# Altium PCB Powerboard.PcbDoc (part 2 of 2)
Units mm, origin at the board's own origin, x right, y up, seen from the top; angles counter-clockwise.
Board outline 74 x 33 mm, 4 copper layers (Top Layer, Layer 1, Layer 2, Bottom Layer), stack 1.17 mm thick; 86 components, 35 nets, 205 pads, 352 vias.
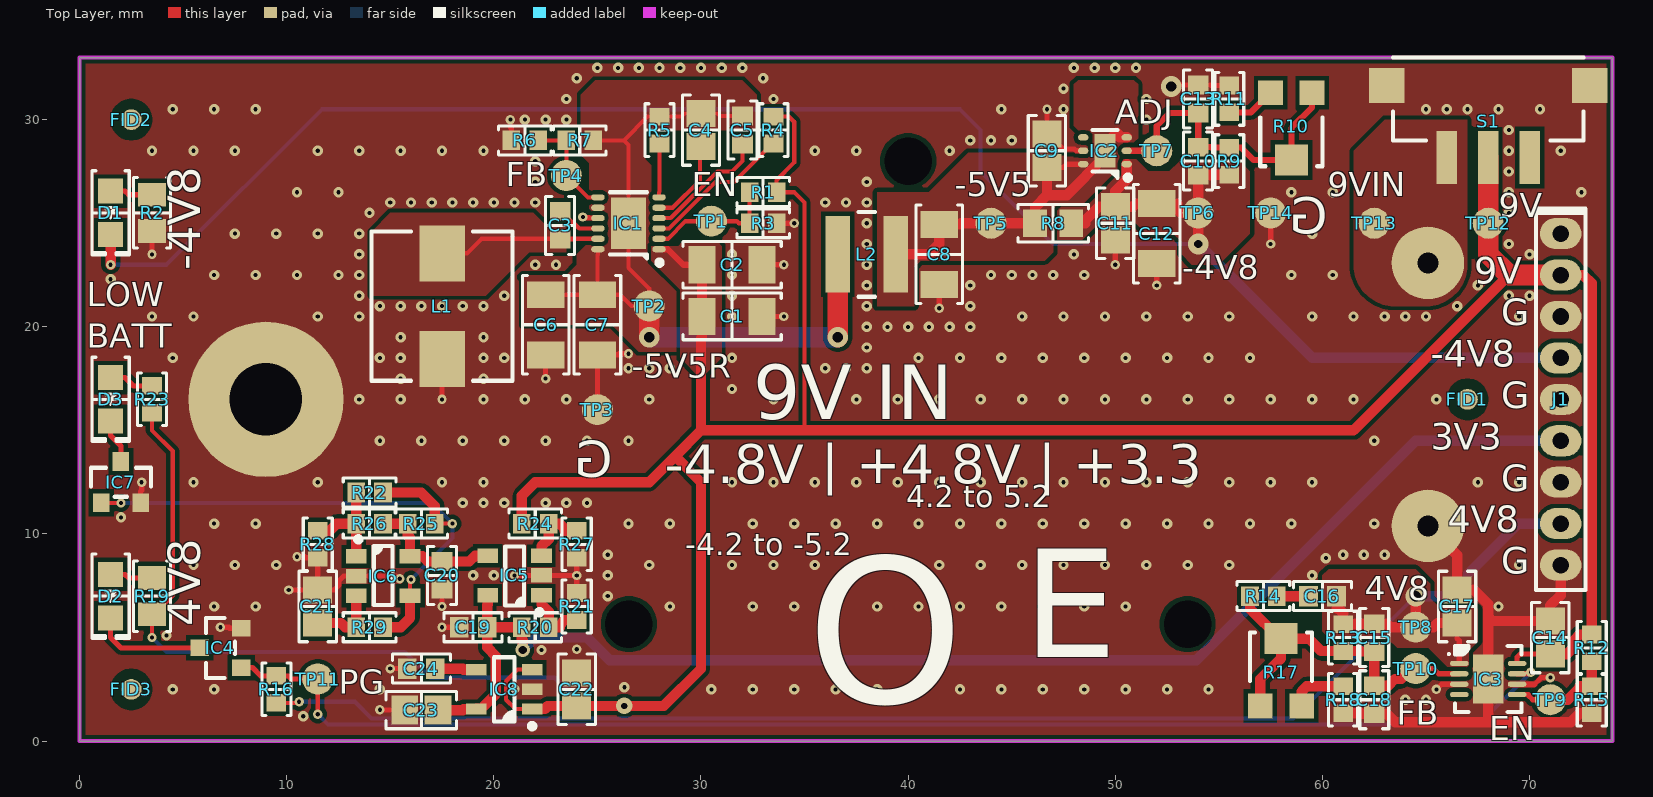
[diagram p0: Top Layer view]

## Part data (continued)
R22 R26 R28: library part RMCF0603FG150K, "RES 150K OHM 1% 1/10W 0603", Device Package="0603 (1608 Metric)", Manufacturer="Stackpole Electronics Inc", Operating Temperature="-55°C ~ 155°C", Power (Watts)="0.1W, 1/10W", Ratings=AEC-Q200, Supplier Device Package=0603, Supplier Part Number 1=RMCF0603FG150KCT-ND, Temperature Coefficient=±100ppm/°C, Tolerance=±1%, ComponentLink1Description=Datasheet, ComponentLink1URL=https://www.seielect.com/catalog/sei-rmcf_rmcp.pdf, ComponentLink2Description="DigiKey Link", ComponentLink2URL=https://www.digikey.com/en/products/detail/stackpole-electronics-inc/RMCF0603FG150K/1713634, Composition="Thick Film", Features="Automotive AEC-Q200", Height - Seated (Max)="0.022\" (0.55mm)", LastUpdated="20/06/2022 12:10:18", Lifecycle Status=Active, Minimum Order=1, Number of Terminations=2, Package / Case="0603 (1608 Metric)", Packaging=CutTape, Part Number=RMCF0603FG150K, Part Status=Active, PartId=13982, Price=0.01, Resistance="150 kOhms", Series=RMCF, Size / Dimension="0.061\" L x 0.031\" W (1.55mm x 0.80mm)", Supplier 1=DigiKey
R23: library part RK73H1JTTD9310F, "RES 931 OHM 1% 1/8W 0603", Device Package="0603 (1608 Metric)", Manufacturer="KOA Speer Electronics, Inc.", Operating Temperature="-55°C ~ 155°C", Power (Watts)="0.125W, 1/8W", Ratings=AEC-Q200, Supplier Device Package=0603, Supplier Part Number 1=2019-RK73H1JTTD9310FTR-ND, Temperature Coefficient=±100ppm/°C, Tolerance=±1%, ComponentLink1Description=Datasheet, ComponentLink1URL=http://www.koaspeer.com/catimages/Products/RK73H/RK73H.pdf, ComponentLink2Description="DigiKey Link", ComponentLink2URL=https://www.digikey.com/en/products/detail/koa-speer-electronics-inc/RK73H1JTTD9310F/9845315, Composition="Thick Film", Features="Automotive AEC-Q200, Moisture Resistant", Height - Seated (Max)="0.022\" (0.55mm)", LastUpdated="20/06/2022 12:10:31", Lifecycle Status=Active, Minimum Order=0, Number of Terminations=2, Package / Case="0603 (1608 Metric)", Part Number=RK73H1JTTD9310F, Part Status=Active, PartId=8605, Price=0, Resistance="931 Ohms", Series=RK73H, Size / Dimension="0.063\" L x 0.031\" W (1.60mm x 0.80mm)", Supplier 1=DigiKey
R24: library part RC0603FR-07300KL, "RES 300K OHM 1% 1/10W 0603", Device Package="0603 (1608 Metric)", Manufacturer=Yageo, Operating Temperature="-55°C ~ 155°C", Power (Watts)="0.1W, 1/10W", Supplier Device Package=0603, Supplier Part Number 1=311-300KHRCT-ND, Temperature Coefficient=±100ppm/°C, Tolerance=±1%, ComponentLink1Description=Datasheet, ComponentLink1URL=https://www.yageo.com/upload/media/product/productsearch/datasheet/rchip/PYu-RC_Group_51_RoHS_L_10.pdf, ComponentLink2Description="DigiKey Link", ComponentLink2URL=https://www.digikey.com/en/products/detail/yageo/RC0603FR-07300KL/727145, Composition="Thick Film", Features="Moisture Resistant", Height - Seated (Max)="0.022\" (0.55mm)", LastUpdated="20/06/2022 12:10:33", Lifecycle Status=Active, Minimum Order=1, Number of Terminations=2, Package / Case="0603 (1608 Metric)", Packaging=CutTape, Part Number=RC0603FR-07300KL, Part Status=Active, PartId=7517, Price=0.01, Resistance="300 kOhms", Series=RC_L, Size / Dimension="0.063\" L x 0.031\" W (1.60mm x 0.80mm)", Supplier 1=DigiKey
R25: library part RMCF0603FT1K00, "RES 1K OHM 1% 1/10W 0603", Device Package="0603 (1608 Metric)", Manufacturer="Stackpole Electronics Inc", Operating Temperature="-55°C ~ 155°C", Power (Watts)="0.1W, 1/10W", Ratings=AEC-Q200, Supplier Device Package=0603, Supplier Part Number 1=RMCF0603FT1K00CT-ND, Temperature Coefficient=±100ppm/°C, Tolerance=±1%, ComponentLink1Description=Datasheet, ComponentLink1URL=https://www.seielect.com/catalog/sei-rmcf_rmcp.pdf, ComponentLink2Description="DigiKey Link", ComponentLink2URL=https://www.digikey.com/en/products/detail/stackpole-electronics-inc/RMCF0603FT1K00/1761077, Composition="Thick Film", Features="Automotive AEC-Q200", Height - Seated (Max)="0.022\" (0.55mm)", LastUpdated="20/06/2022 12:09:49", Lifecycle Status=Active, Minimum Order=1, Number of Terminations=2, Package / Case="0603 (1608 Metric)", Packaging=CutTape, Part Number=RMCF0603FT1K00, Part Status=Active, PartId=23839, Price=0.01, Resistance="1 kOhms", Series=RMCF, Size / Dimension="0.061\" L x 0.031\" W (1.55mm x 0.80mm)", Supplier 1=DigiKey
S1: "SWITCH SLIDE SPDT 0.4VA 28V", Current Rating (Amps)="0.4VA (AC/DC)", Manufacturer="NKK Switches", Operating Temperature="-25°C ~ 85°C", Supplier Part Number 1=360-2924-1-ND, Voltage Rating - AC=28V, Actuator Length=2.00mm, Actuator Type=Standard, Circuit=SPDT, ComponentLink1Description=Datasheet, ComponentLink1URL=http://www.nkkswitches.com/pdf/SS3surfaceMount-1.pdf, ComponentLink2Description="DigiKey Link", ComponentLink2URL=http://digikey.com/product-detail/en/nkk-switches/SS312SAH4-R/360-2924-1-ND/1051215, Contact Finish=Gold, Contact Material="Phosphor Bronze", Contact Timing="Shorting (MBB)", LastUpdated="04/01/2020 19:10:14", Lifecycle Status=Active, Minimum Order=1, Mounting Type="Surface Mount, Right Angle", Packaging=TapeAndReel, Part Number=SS312SAH4-R, Part Status=Active, PartId=1, Price=1.95, Series=SS3, Supplier 1=DigiKey, Switch Function=On-On, Termination Style="Gull Wing", Voltage Rating - DC=28V
TP1 TP2 TP3 TP4 TP5 TP6 TP7 TP8 TP9 TP10 TP11 TP12 TP13 TP14: library part CMP-003-000000-1, Component Type="Standard (No BOM)", Design Item ID="Test Point", Pin Count=1, Source="Test Point.SchLib"

## Free pads (board coordinates)
  round 7.5 hole 3.5: M(9,16.5)

## Via types
v1: diameter 0.5, hole 0.2, Top Layer to Bottom Layer, tented both sides, 308 vias
v2: diameter 0.45, hole 0.2, Top Layer to Bottom Layer, tented both sides, 37 vias
v3: diameter 1, hole 0.5, Top Layer to Bottom Layer, tented both sides, 4 vias
v4: diameter 1, hole 0.4, Top Layer to Bottom Layer, tented both sides, 1 vias
v5: diameter 0.7, hole 0.4, Top Layer to Bottom Layer, tented both sides, 1 vias
v6: diameter 0.8, hole 0.3, Top Layer to Bottom Layer, tented both sides, 1 vias

## Nets (pads, with @x,y where several pads share a name; then routed paths per layer and width w, separated by ;. In a path a pad name is that pad's centre, name@x,y a point inside that pad or via, vN(x,y) a via of type N, cw(c..) or ccw(c..) an arc to the next point about the centre after c; other vN are vias at no path point)
3V3: C19.2 C23.2 IC5.5 IC8.5 J1.6 R20.2 | length 66.1
  Top Layer w0.5: C23.2 18.5,1.5 18.55,1.55 IC8.5 19.175,1.575 19.4,1.575 20.1,2.275 20.1,4.1 19.675,4.525 C19.2 ; IC5.5 19.7,6.6 19.675,6.575 C19.2 ; v5(21.4,4.4) 21.4,4.875 21.35,4.925 R20.2 C19.2
  Bottom Layer w0.5: v5(21.4,4.4) 22,5 24.5,5 25.6,3.9 53.9,3.9 64.5,14.5 J1.6
3V3BYPASS: C24.2 IC8.4 | length 2
  Top Layer w0.5: C24.2 18.5,3.5 18.55,3.45 IC8.4
4V8: C15.2 C16.2 C17.2 IC3.1 J1.8 R13.2 R16.2 TP8.1 | length 77
  Top Layer w0.2: R16.2@9.55,1.9 R16.2 10.6,1.85 v2(10.6,1.9)
  Top Layer w0.25: C17.2 66.5,4.95 66.605,4.845 IC3.1
  Top Layer w0.5: C16.2 60.675,6.4 60.775,6.4 61,6.175 R13.2 61.575,5.65 61.6,5.675 C15.2 63.1,5.675 63.275,5.5 TP8.1 ; v3(64.5,7) TP8.1 ; C17.2 65.55,5.7 65.35,5.5 TP8.1
  Bottom Layer w0.2: v2(10.6,1.9) 13.298,1.9 14.098,1.1 58.6,1.1 v3(64.5,7)
  Bottom Layer w0.5: v3(64.5,7) 65.962,7 69.462,10.5 J1.8
9V: C1.2 C2.2 C14.2 C22.2 IC1.1 IC3.8 IC8.1 IC8.3 J1.2 R1.2 R4.1 R12.2 R19.2 R23.2 R24.2 S1.2 TP12.1 | length 172.5
  Top Layer w0.2: v2(3.5,5) R19.2 3.6,6.125 4.5,7.025 4.5,14 3.5,15 R23.2 ; IC8.1 21.039,1.55 20.589,2 20.589,2.893 21.146,3.45 IC8.3 ; R4.1 34.25,30.15 34.5,29.9 34.5,27.925 33.65,27.075 R1.2 34.5,26.5 35,26 35,15
  Top Layer w0.25: IC3.8 69.395,4.052 69.543,4.2 C14.2
  Top Layer w0.3: IC1.1 28.4,23.75 29.15,23 C2.2
  Top Layer w0.5: R24.2 21.35,11.85 22,12.5 27.5,12.5 28.75,13.75 ; IC8.1 22.45,1.55 22.6,1.7 C22.2 28.2,1.7 30,3.5 30,12.5 28.75,13.75 ; C2.2 C1.2 30.05,19.5 30,19.45 30,15 ; 69,22.5 61.5,15 35,15 30,15 ; C14.2 71.8,4.2 72.15,4.55 72.15,4.875 72.425,5.15 R12.2 73,22.1 72.6,22.5 J1.2 ; 28.75,13.75 30,15
  Top Layer w1: S1.2 TP12.1 68,23.5 69,22.5 J1.2
  Bottom Layer w0.2: v2(3.5,5) 4.2,4.3 15.7,4.3 16.94,3.06 22.94,3.06 24.3,1.7 v6(26.3,1.7)
9VIN: B1.1 S1.1 TP13.1
-4V8: C10.2 C11.2 C12.2 D1.2 IC2.1 J1.4 R8.2 R9.2 TP6.1 | length 94.8
  Top Layer w0.5: v2(1.5,23) 1.5,23.75 D1.2 ; R8.2 48.55,25 48.55,25.15 49.2,25.8 C11.2 ; IC2.1 50.55,27.1 50,26.55 C11.2 ; v4(54,24) 54,24.65 TP6.1 ; R9.2 54.625,27.35 54.6,27.325 C10.2 TP6.1 ; C11.2 50.85,25.8 51,25.95 C12.2 53,25.95 53,25.65 53.15,25.5 TP6.1
  Bottom Layer w0.2: v2(1.5,23) 4.2,23 11.7,30.5 42.5,30.5 43.5,29.5 43.5,27.5 47,24 v4(54,24)
  Bottom Layer w0.5: v4(54,24) 59.5,18.5 J1.4
-5V5: C8.2 C9.2 IC2.3 IC2.6 IC2.7 L2.2 R8.1 TP5.1 | length 18.3
  Top Layer w0.25: C9.2 47.5,27.7 47.65,27.85 IC2.6
  Top Layer w0.5: L2.2 41,23.5 41.5,24 C8.2 42.5,24.95 42.55,25 TP5.1 R8.1 46.125,25.775 46.7,26.35 ; C9.2 46.7,26.35 ; IC2.3 50.2,29.15 50.2,29.241 50.071,29.371 49.5,28.8 IC2.7 49.5,28.2 47.65,26.35 46.7,26.35
-5V5REG: C4.1 C5.1 C6.1 C7.1 IC1.8 IC1.12 IC1.13 L2.1 R5.1 R7.1 TP2.1 | length 38.3
  Top Layer w0.2: C6.1 C7.1 ; R7.1 26.275,29 ; IC1.12 25.025,23.5 25,23.475 C7.1 ; C5.1 30.925,30.175 30.8,30.3 C4.1 29.2,30.3 29.05,30.15 R5.1 27.425,30.15 26.275,29 ; C7.1 26.1,21.55 26.65,21 TP2.1 27.5,21.85 26.5,22.85 IC1.13 26.5,28.775 26.275,29
  Top Layer w1: v3(27.5,19.5) 27.5,20.15 TP2.1 ; v3(36.6,19.5) L2.1
  Bottom Layer w1: v3(27.5,19.5) v3(36.6,19.5)
ADJ_-4V8: C10.1 C13.2 IC2.2 R9.1 R10.1 R10.2 TP7.1 | length 15
  Top Layer w0.3: IC2.2 TP7.1 52,29.7 52.625,30.325 C13.2 C10.1 54.6,28.675 54.625,28.65 R9.1 56.075,28.65 56.675,28.05 R10.2 58.5,29.6 59.5,30.6 R10.1
BLINK_FB: IC6.1 R22.2 R26.1 R28.2 | length 5.1
  Top Layer w0.5: R28.2 12.075,10.15 12.425,10.5 R26.1 ; R22.2 13.35,11.075 R26.1 ; IC6.1 13.356,9.919 13.35,9.925 R26.1
BLINK_GATE: IC6.4 IC7.1 R22.1 R25.1 R29.2 | length 28.7
  Top Layer w0.2: IC7.1 v2(2,11.5) ; IC6.4 15.956,7.756 v2(16,7.8) ; R25.1 v2(18,10.5)
  Top Layer w0.5: R29.2 15.5,5.5 15.956,5.956 IC6.4 ; R22.1 15.175,12 16.5,12 17.15,11.35 R25.1
  Bottom Layer w0.2: v2(2,11.5) 17,11.5 v2(18,10.5) 18,9.8 v2(16,7.8)
BLINK_INV: C21.2 IC6.3 R29.1 | length 3.5
  Top Layer w0.5: C21.2 12.625,5.7 12.825,5.5 R29.1 13.35,6.075 13.356,6.081 IC6.3
BLINK_LED: D3.2 IC7.3 | length 2.2
  Top Layer w0.25: D3.2 1.5,14.75 2,14.25 IC7.3
BST_-5V5: C3.2 IC1.10 | length 2.2
  Top Layer w0.2: C3.2 23.25,25.575 23.771,25.054 23.821,25.054 24.125,24.75 IC1.10
EN_4V8: IC3.5 R12.1 R15.2 TP9.1 | length 5.2
  Top Layer w0.25: IC3.5 69.945,2.25 69.945,2.205 70.15,2 TP9.1
  Top Layer w0.5: TP9.1 71.85,2 72.425,2.575 72.425,2.65 R15.2 73,3.325 R12.1
EN_-5V5: IC1.2 R1.1 R3.2 TP1.1 | length 6.3
  Top Layer w0.2: IC1.2 28.4,24.25 29.25,25.1 TP1.1 31.725,25.1 31.825,25 R3.2 32.35,25.575 R1.1
FB_4V8: C15.1 C18.2 IC3.2 R13.1 R14.1 R17.1 R17.2 TP10.1 | length 17.3
  Top Layer w0.25: TP10.1 65.35,3.5 65.6,3.25 IC3.2
  Top Layer w0.5: R14.1 56.5,6.425 56.5,6.4 57.95,4.95 R17.2 ; R17.1 57,3 58,4 R17.2 ; TP10.1 64.298,3.5 63.798,3 63.5,3 63.175,2.675 C18.2 C15.1 61.9,4.325 61.875,4.35 59.95,4.35 59.35,4.95 R17.2
FB_-5V5: IC1.7 R6.1 R7.2 TP4.1 | length 5
  Top Layer w0.2: R6.1 R7.2 TP4.1 24.55,26.25 IC1.7
GND: B1.2 C1.1 C2.1 C6.2 C7.2 C8.1 C9.1 C11.1 C12.1 C13.1 C14.1 C17.1 C18.1 C19.1 C20.1 C21.1 C22.1 C23.1 C24.1 IC1.9 IC2.5 IC3.3 IC3.6 IC3.9 IC4.2 IC5.2 IC6.2 IC7.2 IC8.2 J1.1 J1.3 J1.5 J1.7 J1.9 L1.2 pad.M R2.2 R3.1 R6.2 R11.1 R15.1 R18.1 R21.1 R27.1 R28.1 S1.M TP3.1 TP14.1 | length 75
  Top Layer w0.25: IC7.2 2.95,12.05 3,12.1 v2(3,12.5) ; v2(3.5,23.5) R2.2 ; v2(6.8,5.5) 7.2,5.5 7.25,5.45 IC4.2 ; v2(10.1,7.3) C21.1 ; v2(10.5,8.9) 10.875,8.9 10.925,8.85 R28.1 C21.1 ; v2(14.5,1.515) 14.515,1.5 C23.1 ; v2(15,3.5) C24.1 ; v2(15.461,7.839) 15.407,7.839 15.279,7.967 12.756,7.967 12.528,7.739 12.528,7.528 12.3,7.3 C21.1 ; v2(17.5,5.5) C19.1 ; v2(17.5,6.5) C20.1 ; v2(17.5,16.5) 17.5,17 L1.2 ; v2(20.8,30) 20.8,29.625 20.85,29.575 R6.2 ; v2(21,8) IC5.2 v2(24,8) ; v2(22.5,17.5) C6.2@22.5,18.05 ; R21.1 24,7.675 v2(24,8) ; R27.1 24,8.325 v2(24,8) ; v2(24.3,25.3) 24.338,25.262 24.588,25.262 24.6,25.25 IC1.9 ; TP3.1 25,18.125 C7.2@25.525,18.65 ; C7.2 C7.2@25.525,18.65 ; v2(26.5,18.7) 26.05,18.7 26,18.65 C7.2@25.525,18.65 ; C1.1 33.7,20.5 v2(34,20.5) ; C2.1 33.7,23 v2(34,23) ; R3.1 v2(34.5,25) ; v2(41.5,20.9) C8.1 ; v2(46.7,30.5) C9.1 46.75,29.3 47.471,28.579 48.021,28.579 48.1,28.5 IC2.5 ; v2(50,23) C11.1 ; v2(52,22) C12.1 ; v3(52.7,31.6) 52.775,31.675 C13.1 54.6,31.675 54.625,31.65 R11.1 ; v2(57.5,24) TP14.1 ; v2(65.5,2.5) 65.75,2.75 IC3.3 ; IC3.6 70.25,2.75 70.565,3.065 v2(71,3.065)
  Top Layer w0.5: R18.1 61.875,1.35 61.9,1.325 C18.1 63.1,1.325 63.515,0.91 68,0.91 ; B1.2 66.5,8.98 66.5,8.05 C17.1 67.3,7.3 68,6.6 68,6 ; J1.9 71.5,7.05 71,6.55 C14.1 68.2,5.8 68,6 ; R15.1 72.425,1.35 71.985,0.91 68,0.91 ; 68,0.91 IC3.9 68,6
  other v1: 10.8,1.2 64,2 65,2 4.5,2.5 6.5,2.5 14.5,2.5 30.5,2.5 32.5,2.5 34.5,2.5 36.5,2.5 38.5,2.5 40.5,2.5 42.5,2.5 44.5,2.5 46.5,2.5 48.5,2.5 50.5,2.5 52.5,2.5 54.5,2.5 26.3,2.6 22.3,4.4 4.2,5.1 6.5,6.5 8.5,6.5 28.5,6.5 32.5,6.5 34.5,6.5 36.5,6.5 38.5,6.5 40.5,6.5 42.5,6.5 44.5,6.5 46.5,6.5 48.5,6.5 50.5,6.5 68.5,6.5 25.5,7 19,8 20,8 25.5,8 59.5,8 5.5,8.5 7.5,8.5 9.5,8.5 27.5,8.5 31.5,8.5 33.5,8.5 35.5,8.5 37.5,8.5 39.5,8.5 41.5,8.5 43.5,8.5 45.5,8.5 47.5,8.5 49.5,8.5 51.5,8.5 53.5,8.5 55.5,8.5 69.5,8.5 60.167,8.833 25.5,9 61,9 62,9 63,9 6.5,10.5 8.5,10.5 26.5,10.5 28.5,10.5 32.5,10.5 34.5,10.5 36.5,10.5 38.5,10.5 40.5,10.5 42.5,10.5 44.5,10.5 46.5,10.5 48.5,10.5 50.5,10.5 52.5,10.5 54.5,10.5 56.5,10.5 58.5,10.5 62.5,10.5 2,10.8 18.5,11.5 19.5,11.5 20.5,11.5 22.5,11.5 23.5,11.5 24.5,11.5 5.5,12.5 11.5,12.5 17.5,12.5 19.5,12.5 31.5,12.5 33.5,12.5 35.5,12.5 37.5,12.5 39.5,12.5 41.5,12.5 43.5,12.5 45.5,12.5 47.5,12.5 49.5,12.5 51.5,12.5 53.5,12.5 55.5,12.5 57.5,12.5 59.5,12.5 67.5,12.5 69.5,12.5 14.5,14.5 16.5,14.5 18.5,14.5 20.5,14.5 22.5,14.5 24.5,14.5 26.5,14.5 62.5,14.5 13.5,16.5 15.5,16.5 19.5,16.5 21.5,16.5 23.5,16.5 27.5,16.5 33.5,16.5 37.5,16.5 39.5,16.5 41.5,16.5 43.5,16.5 45.5,16.5 47.5,16.5 49.5,16.5 51.5,16.5 53.5,16.5 55.5,16.5 57.5,16.5 59.5,16.5 61.5,16.5 65.5,16.5 31.5,17 15.5,17.5 19.5,17.5 26.5,18 27.5,18 28.5,18 36,18 37,18 38,18 4.5,18.5 14.5,18.5 15.5,18.5 19.5,18.5 20.5,18.5 31.5,18.5 40.5,18.5 42.5,18.5 44.5,18.5 46.5,18.5 48.5,18.5 50.5,18.5 52.5,18.5 54.5,18.5 56.5,18.5 38,19 15.5,19.5 19.5,19.5 38,20 39,20 40,20 41,20 42,20 43,20 3.5,20.5 5.5,20.5 11.5,20.5 13.5,20.5 31.5,20.5 45.5,20.5 47.5,20.5 49.5,20.5 51.5,20.5 53.5,20.5 55.5,20.5 59.5,20.5 61.5,20.5 63,20.5 64,20.5 65,20.5 69.5,20.5 14.5,21 15.5,21 16.5,21 17.5,21 18.5,21 19.5,21 38,21 43,21 66.5,21 13.5,21.5 20.5,21.5 31.5,21.5 69,21.5 70,21.5 38,22 43,22 67.5,22 1.5,22.3 6.5,22.5 8.5,22.5 10.5,22.5 12.5,22.5 13.5,22.5 31.5,22.5 44,22.5 45,22.5 46,22.5 47,22.5 48.5,22.5 58.5,22.5 60.5,22.5 22,23 23,23 38,23 13.5,23.5 31.5,23.5 48,23.5 70,23.5 38,24 69,24 7.5,24.5 9.5,24.5 11.5,24.5 13.5,24.5 59.5,24.5 38,25 14,25.5 69,25.5 15,26 16,26 17,26 18,26 19,26 20,26 21,26 22,26 36,26 37,26 38,26 10.5,26.5 12.5,26.5 58.5,26.5 60.5,26.5 69,26.5 72.5,26.5 22,27 38,27 69,27.5 22,28 3.5,28.5 5.5,28.5 7.5,28.5 11.5,28.5 13.5,28.5 15.5,28.5 17.5,28.5 19.5,28.5 35.5,28.5 37.5,28.5 42,28.5 69,28.5 71.5,28.5 43,29 44,29 45,29 69,29.5 21.5,30 22.5,30 23.5,30 51.5,30 4.5,30.5 6.5,30.5 8.5,30.5 44.5,30.5 47.5,30.5 65,30.5 66,30.5 67,30.5 68.5,30.5 70.5,30.5 23.5,31 33.5,31 51.5,31 47.5,31.5 24,32 33,32 25,32.5 26,32.5 27,32.5 28,32.5 29,32.5 30,32.5 31,32.5 32,32.5 48,32.5 49,32.5 50,32.5 51,32.5
  other v2: 21.004,2.515 24,4.435
LED_4V8: D2.2 IC4.3 | length 5.5
  Top Layer w0.25: D2.2 1.5,5 2,4.5 IC4.3
LED_-4V8: D1.1 R2.1 | length 2.1
  Top Layer w0.25: D1.1 2.2,26.55 2.375,26.375 R2.1
LOWBAT_CHK: IC5.3 R24.1 R27.2 | length 3.2
  Top Layer w0.5: IC5.3 22.3,9.4 22.65,9.75 R24.1 23.175,10.5 23.425,10.25 23.425,10.15 R27.2
LOWBAT_REF: IC5.1 R20.1 R21.2 | length 3.2
  Top Layer w0.5: IC5.1 22.3,6.6 22.65,6.25 R20.1 23.175,5.5 23.175,5.6 23.425,5.85 R21.2
LX_-5V5: C3.1 IC1.11 L1.1 | length 8.5
  Top Layer w0.2: L1.1 18.7,23.55 19.4,24.25 23.825,24.25 ; C3.1 23.8,24.225 23.825,24.25 ; IC1.11 23.825,24.25
NetD2_1: D2.1 R19.1 | length 2.1
  Top Layer w0.25: D2.1 2.2,8.05 2.375,7.875 R19.1
NetD3_1: D3.1 R23.1 | length 2.2
  Top Layer w0.25: D3.1 2.2,17.55 2.6,17.15 R23.1
NetR10_3: R10.3 R11.2 | length 2.4
  Top Layer w0.3: R11.2 56.55,30.35 R10.3
NetR17_3: R17.3 R18.2 | length 2.8
  Top Layer w0.5: R17.3 59,2.4 59.25,2.65 R18.2
NR_4V8: C16.1 R14.2 | length 1.5
  Top Layer w0.5: R14.2 C16.1
PG_4V8: IC3.7 IC4.1 R16.1 TP11.1 | length 66.1
  Top Layer w0.2: v2(11.5,1.3) TP11.1
  Top Layer w0.25: IC4.1 8.35,3.55 8.75,3.15 R16.1 10.075,3.15 10.225,3 TP11.1 ; IC3.7 69.945,3.25 70.02,3.325 v2(70.06,3.325)
  Bottom Layer w0.2: v2(11.5,1.3) 12,0.8 67.535,0.8 v2(70.06,3.325)
RST_-5V5: IC1.3 R4.2 | length 7.2
  Top Layer w0.2: IC1.3 28.45,24.75 30.694,26.994 31.594,26.994 33.45,28.85 R4.2
RT_-5V5: IC1.6 R5.2 | length 2.6
  Top Layer w0.2: IC1.6 27.975,26.5 28,26.525 R5.2
SS_-5V5: C5.2 IC1.4 | length 6
  Top Layer w0.2: IC1.4 28.54,25.25 30.795,27.505 31.505,27.505 32,28 32,28.275 C5.2
VBATLOW: C20.2 IC5.4 IC6.5 R25.2 R26.2 | length 6.8
  Top Layer w0.5: R26.2 R25.2 15.85,9.925 15.956,9.819 IC6.5 16.556,8.917 16.798,8.675 C20.2 18.825,8.675 19.1,8.95 IC5.4
VCC_-5V5: C4.2 IC1.5 | length 4.2
  Top Layer w0.2: IC1.5 28.63,25.75 29.95,27.07 29.95,28.65 C4.2
pads on no net: B1.M FID1.F FID2.F FID3.F IC2.4 IC3.4 S1.3

## Polygon pours and split planes (outlines as drawn)
GND on Bottom Layer "GND_L04_P008" (solid, remove dead copper, pour order 8): 0,0 0,33 74.5,33 74.5,0
GND on Top Layer "GND_L01_P007" (solid, remove dead copper, pour order 7): 0,0 0,33 74.5,33 74.5,0
4V8 on Top Layer "4V8_L01_P006" (solid, remove dead copper, pour order 6): 67.1,4.4 67.5,4.8 67.5,6.5 65.6,6.5 65.2,6.9 65.2,7.6 64.5,8.3 60.3,8.3 60,8 60,5.3 60.3,5 63.1,5 63.6,4.5 65.1,4.5 66.1,3.5 67.1,3.5
-4V8 on Top Layer "-4V8_L01_P005" (solid, remove dead copper, pour order 5): 47.3,26 48.5,26 49.9,27.4 50.2,27.4 50.2,28.05 50.25,28.1 51,28.1 51.6,27.5 52.6,27.5 53.1,28 56,28 56.5,27.5 56.5,24.5 55,23 53.7,23 53.2,23.5 53.2,24.1 52.8,24.5 51.5,24.5 50.9,25.1 49.3,25.1 48.4,24.2 47,24.2 47,25.7
-5V5 on Top Layer "-5V5_L01_P004" (solid, remove dead copper, pour order 4): 38.5,21 40.3,21 40.3,22.9 40.6,23.2 46.6,23.2 47,23.6 47,25.7 47.3,26 48.5,26 49.9,27.4 50.2,27.4 50.2,28.7 50.4,28.9 50.9,28.9 51.1,29.1 51.1,31.7 50.9,31.9 48.2,31.9 48,31.7 48,29.7 48.2,29.5 48.7,29.5 48.9,29.3 48.9,28.3 48.8,28.2 47.6,28.2 47.4,28.4 42.9,28.4 41,26.5 38.5,26.5
-5V5REG on Top Layer "-5V5REG_L01_P003" (solid, remove dead copper, pour order 3): 32.7,31.2 32,31.9 24.9,31.9 24.2,31.2 24.2,28.3 24.6,27.9 24.6,25.7 24.8,25.5 25.5,25.5 25.5,24 24.5,24 24,23.5 24,23 23.5,22.5 21.4,22.5 21.3,22.4 21.4,22.3 21.4,20.1 25.7,20.1 27,18.8 29,18.8 29,21.8 27.6,23.2 27.6,27.8 27.3,28.1 27.3,29.5 32.7,29.5
9V on Top Layer "9V_L01_P002" (solid, remove dead copper, pour order 2): 28.9,23.9 29.1,24.1 30.8,24.1 31,23.9 31,18.5 30,17.5 29,18.5 29,21.8 27.6,23.2 27.6,23.9
LX_-5V5 on Top Layer "LX_-5V5_L01_P001" (solid, remove dead copper, pour order 1): 23.5,24.8 23.5,23.6 21.7,23.6 19.6,21.5 14.1,21.5 14.1,24.6 15,25.5 21.9,25.5 22.6,24.8
9VIN on Top Layer "9VIN_L01_P000" (solid, remove dead copper, pour order 0): 67,23 cw(c65,23) 65,21 63.5,21 cw(c63.5,23) 61.5,23 61.5,28.5 63,30 67,30
GND on Layer 2 (split plane): 73.49,0.51 0.51,0.51 0.51,32.49 73.49,32.49
GND on Layer 1 (split plane): 73.49,0.51 0.51,0.51 0.51,32.49 73.49,32.49

## Keep-outs
Keep-Out Layer:
  the board outline again, w0.2

## Silkscreen, mask and mechanical layers (free items; w line width, h text height)
Top Overlay:
  text "ADJ" at 50.001,29.411 h2
  text "FB" at 20.581,26.411 h2
  text "EN" at 29.561,25.911 h2
  text "-5V5" at 42.243,25.911 h2
  text "9VIN" at 60.256,25.911 h2
  text "9V" at 68.511,24.911 h2
  text "G" at 60.249,23.911 h3
  text "-4V8" at 6.357,22.739 h2.7 r90
  text "-4V8" at 53.236,21.911 h2
  text "9V" at 67.33,21.638 h2.2
  text "G" at 68.62,19.64 h2.2
  text "LOW / BATT" at 0.351,18.615 h2
  text "-4V8" at 65.239,17.638 h2.2
  text "-5V5R" at 26.649,17.161 h2
  text "G" at 68.62,15.64 h2.2
  text "9V IN" at 32.53,14.663 h4.5
  text "3V3" at 65.239,13.643 h2.2
  text "G" at 25.749,12.161 h3
  text "-4.8V | +4.8V | +3.3" at 28.25,11.825 h3.2
  text "G" at 68.62,11.64 h2.2
  text "4.2 to 5.2" at 39.915,10.918 h1.8
  text "4V8" at 66.045,9.643 h2.2
  text "-4.2 to -5.2" at 29.25,8.623 h1.8
  text "G" at 68.62,7.64 h2.2
  text "4V8" at 62.035,6.411 h2
  text "4V8" at 6.357,5.545 h2.7 r90
  text "E" at 45.556,2.34 h9
  text "PG" at 12.513,1.911 h2
  text "FB" at 63.581,0.411 h2
  text "EN" at 68.061,-0.339 h2
  text "O" at 35.108,-0.932 h14.5
Mechanical 5:
  lines w0.2: 60,3.2 58.5,3.2 58.5,29.9 60.3,29.9 ; 76.2,8.5 71.5,8.5 71.5,24.5 76.2,24.5

## Text inside footprints (layer, text, board x,y; h text height)
B1: Bottom Overlay "+" at 62.49,22.825 h6; Bottom Overlay "-" at 62.49,7.825 h6